# EAGLE board noise-fob (EAGLE 9.2.2)

Size 160 x 100 mm. Coordinates in mm from the lower left corner, seen from the top.
Outline: 0,0 160,0 160,100 0,100 0,0
Copper layers (1*16): Top 0.035mm / dielectric 1.5mm / Bottom 0.035mm
Design rules "default": minimum track width 6mil, minimum drill 0.35mm, track to track 6mil, track to pad 6mil, pad to pad 6mil, via to via 6mil, smd to smd 6mil, copper to edge 40mil, drill to drill 6mil, minimum pad ring 10mil, minimum via ring 8mil, stop-mask expansion 4mil, vias tented up to drill 0mil, thermal gap 10mil

## Footprints (pad centres in the part's own frame; a part is rotated, then mirrored left to right if it is on the bottom)
PIEZO_BUZZER_2 = drill 1.016 pad 2.032: P$1 0,0; P$2 0,10.16
COIN_BATTERY = drill 0.914 pad 1.651: P$1 0,0; P$2 0,-19.685
1/4W_TH_RESISTOR = drill 0.889: P$1 -4.064,0; P$2 4.064,0 | hole 0.762: -4.064,0; 4.064,0
SAIC-CAP-0.15"-LEAD-SPACING-01 = drill 0.889 pad 1.651: P$1 -1.905,0; P$2 1.905,0
TACTILE_SWITCH = drill 0.914 pad 1.651: P$1 0,0; P$2 0,-5.08
LED3MM = drill 0.813 octagon: A -1.27,0; K 1.27,0
DIP_14_SOCKET = drill 0.6 long: P$1 0,0; P$2 0,2.54; P$3 0,5.08; P$4 0,7.62; P$5 0,10.16; P$6 0,12.7; P$7 0,15.24; P$8 -7.62,15.24; P$9 -7.62,12.7; P$10 -7.62,10.16; P$11 -7.62,7.62; P$12 -7.62,5.08; P$13 -7.62,2.54; P$14 -7.62,0
SAIC-CAP-0.2"-LEAD-SPACING-03 = drill 0.889 pad 1.651: P$1 -2.54,0; P$2 2.54,0

## Placement (x,y rotation side)
U$1  PIEZO_BUZZER_2  [PIEZO_BUZZER_2]  -24.13,6.35 0 top  (outside the outline)
U$2  COIN_CELL_BATTERY  [COIN_BATTERY]  -46.48,23.11 0 top  (outside the outline)
U$3  [1/4W_TH_RESISTOR]  -64.01,-1.27 0 top  (outside the outline)
U$4  SAIC-CAP-220UF-015"  [SAIC-CAP-0.15"-LEAD-SPACING-01]  -64.77,-6.86 0 top  (outside the outline)
U$5  TACTILE_SWITCH  [TACTILE_SWITCH]  -67.31,6.1 0 top  (outside the outline)
U$6  [1/4W_TH_RESISTOR]  -64.01,-12.45 0 top  (outside the outline)
U$7  3MM-LED  [LED3MM]  -66.8,-16 0 top  (outside the outline)
U$8  CD40106_SOCKET  [DIP_14_SOCKET]  -70.61,-16.76 0 top  (outside the outline)
U$9  [1/4W_TH_RESISTOR]  -74.42,-19.56 0 top  (outside the outline)
U$10  SAIC-CAP-0.1UF-02"  [SAIC-CAP-0.2"-LEAD-SPACING-03]  -75.95,-22.1 0 top  (outside the outline)

## Library data of the parts
U$1-U$10 = MODEL2OBJECT

## Nets
GND: U$1.P$2 U$2.P$2 U$4.P$2 U$7.K U$8.P$7 U$10.P$1
N$1: U$2.P$1 U$5.P$1
N$2: U$3.P$2 U$5.P$2 U$6.P$2 U$8.P$14
N$3: U$3.P$1 U$4.P$1
N$4: U$6.P$1 U$7.A
N$5: U$8.P$1 U$9.P$2
N$6: U$1.P$1 U$8.P$2 U$9.P$1 U$10.P$2

## Tracks (layer width: path | path; a pad name or v marks a point on that pad's centre or on a via)
GND  (5 unrouted)
N$1  (1 unrouted)
N$2  (3 unrouted)
N$3  (1 unrouted)
N$4  (1 unrouted)
N$5  (1 unrouted)
N$6  (3 unrouted)